# Altium PCB PCB1.pcbdoc
Units mil, origin at the board's own origin, x right, y up, seen from the top; angles counter-clockwise.
Board outline 1275.59 x 1148.67 mil, 2 copper layers (Top Layer, Bottom Layer); 28 components, 15 nets, 106 pads, 4 vias.
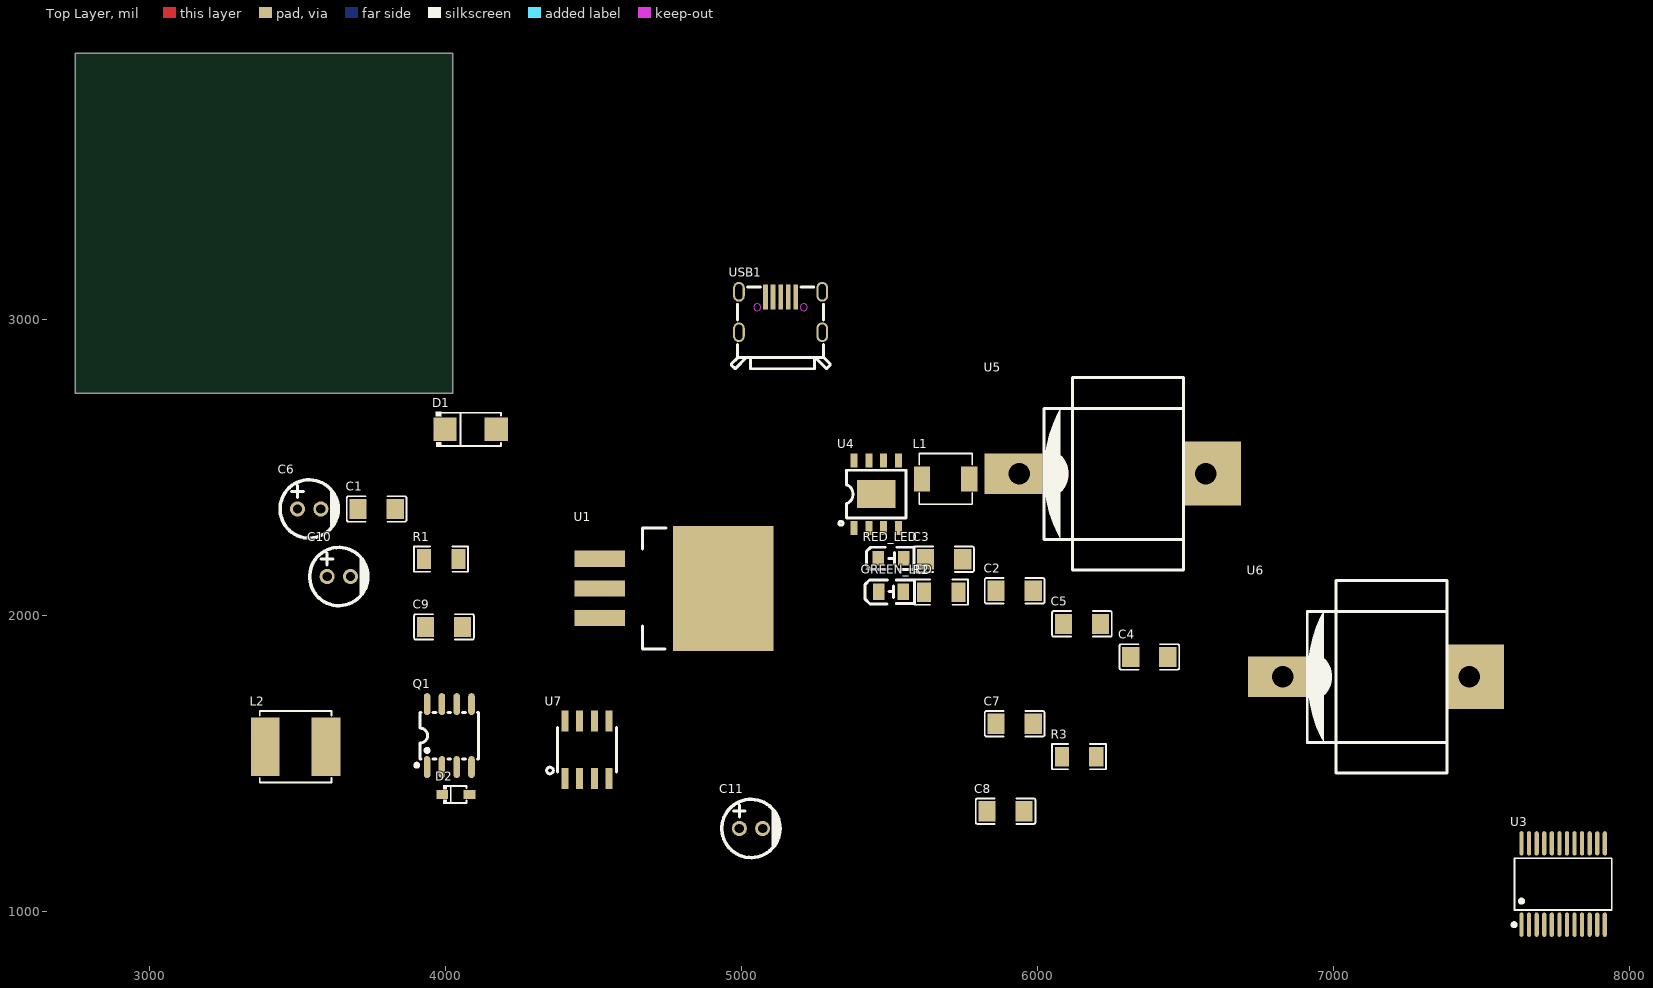
[diagram p0: Top Layer view]
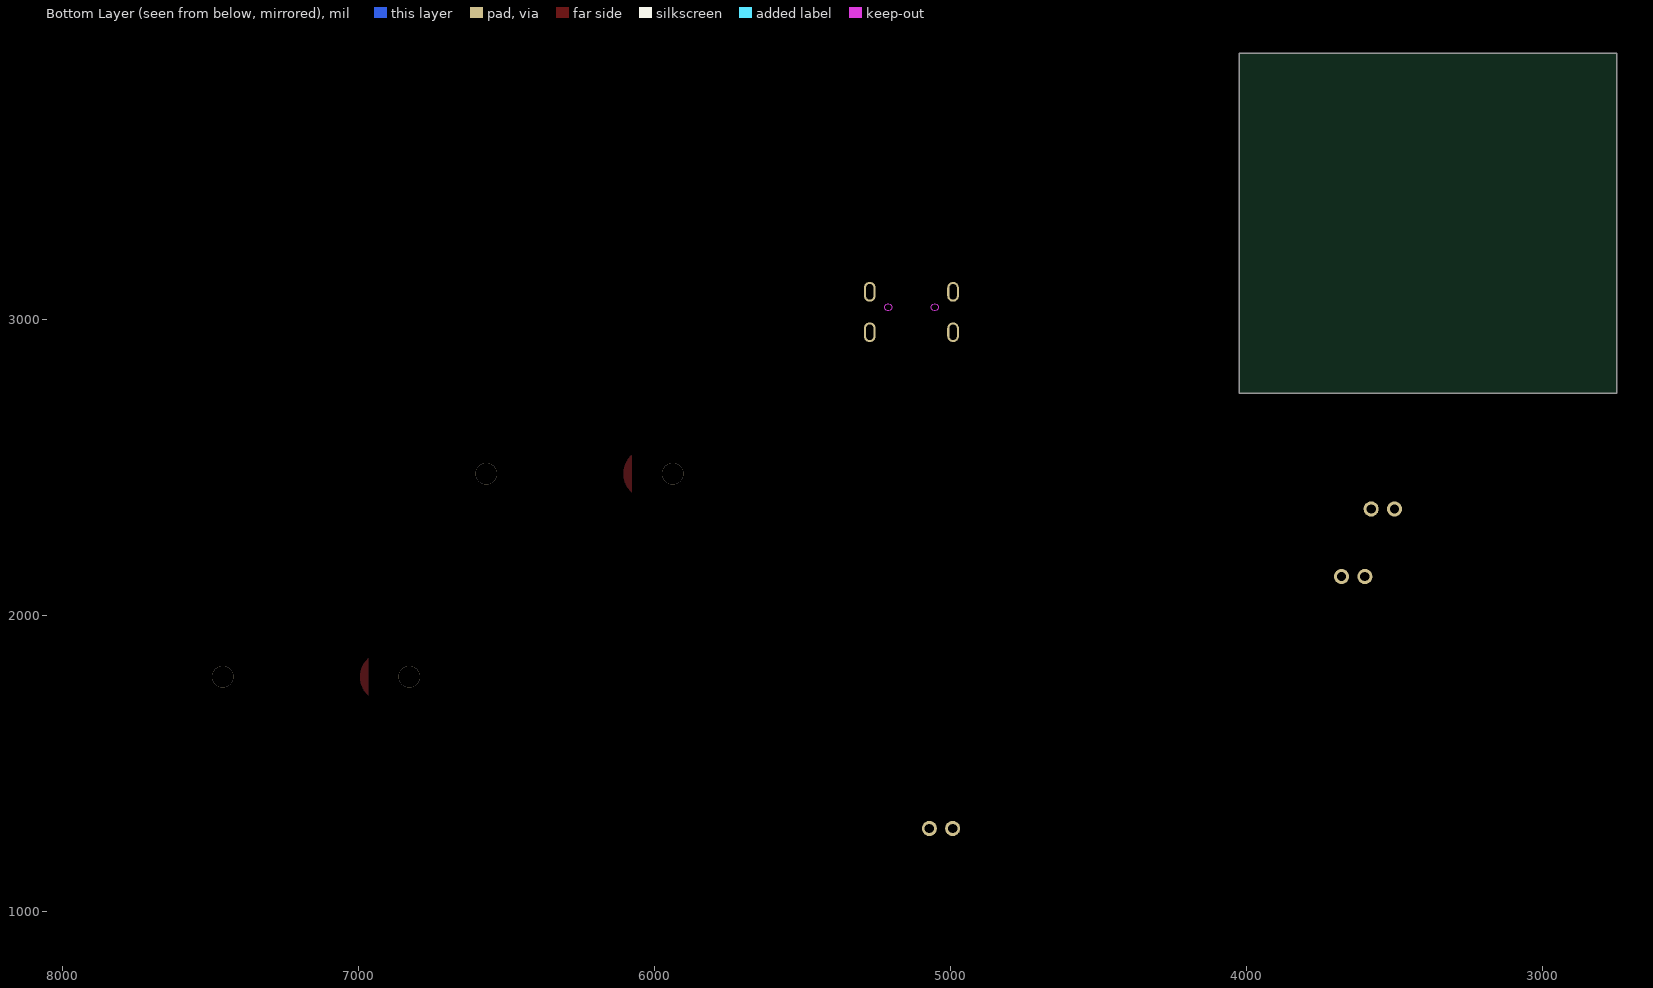
[diagram p1: Bottom Layer view, seen from below]

## Layer stack, top to bottom
Top Solder: solder mask 0.4, Solder Resist, Dk 3.5
Top Layer: signal copper 1.4
Dielectric 1: dielectric 12.6, FR-4, Dk 4.8
Bottom Layer: signal copper 1.4
Bottom Solder: solder mask 0.4, Solder Resist, Dk 3.5

## Board outline
4025.59,2750 2750,2750 2750,3898.67 4025.59,3898.67

## Design rules (kind name [scope] priority, off if disabled: settings)
Clearance [All] p1: gap=10 ignorepadtopadclearanceinfootprint=FALSE except(0: Arc-Hole Track-Hole SMDPad-Hole THPad-Hole Via-Hole Fill-Hole Poly-Hole Region-Hole Text-Hole)
PolygonConnect [All] p1: connectstyle=Relief reliefconductorwidth=10 reliefentries=4 polygonreliefangle="90 Angle" airgapwidth=10
RoutingVias [All] p1: holewidth=28 width=50 viastyle="Through Hole" minholewidth=28 minwidth=50 maxholewidth=28 maxwidth=50
SolderMaskExpansion [All] p1: expansion=4 istentingtop=FALSE
Width [All] p1: maxlimit=10 minlimit=10 preferedwidth=10
30 further rules are at their usual default settings.

## Components (designator, comment, footprint, x,y, rotation, side; value= is the part's Value field where it differs from the comment)
C1 "" C1206 3768.93,2358.48 r0 top
C2 "" C1206 5924.21,2082.07 r0 top
C3 "" C1206 5685.83,2188.44 r0 top
C4 "" C1206 6379.3,1858.64 r0 top
C5 "" C1206 6151.76,1970.35 r0 top
C6 "" CAP-TH_BD5.0-P2.00-D0.8-FD 3540.98,2358.48 r0 top
C7 "" C1206 5924.21,1632.8 r0 top
C8 "" C1206 5893.49,1337.4 r0 top
C9 "" C1206 3996.47,1960.08 r0 top
C10 "" CAP-TH_BD5.0-P2.00-D0.8-FD 3640.98,2130.12 r0 top
C11 "" CAP-TH_BD5.0-P2.00-D0.8-FD 5033.54,1279.08 r0 top
D1 "" SMA_L4.3-W2.6-LS5.1-RD 4086.53,2627.58 r0 top
D2 "" SOD-323_L1.8-W1.3-LS2.5-RD 4036.53,1393.77 r0 top
GREEN_LED "" LED0805-R-RD 5506.81,2078.85 r0 top
L1 "" IND-SMD_L4.4-W4.2 5691.25,2459.9 r0 top
L2 "" IND-SMD_L6.0-W6.0_SWPA6045S 3495,1555 r0 top
Q1 "" SO-8_L4.9-W3.9-P1.27-LS5.9-BL 4014.34,1592.74 r0 top
R1 "" R1206 3986.53,2188.97 r0 top
R2 "" R1206 5675.89,2077.25 r0 top
R3 "" R1206 6141.82,1521.62 r0 top
RED_LED "" LED0805-RD_RED 5506.81,2191.66 r0 top
U1 "" TO-263-3L_L10.0-W9.2-P2.54-TL 4731.3,2090 r0 top
U3 "" SSOP-24_L8.4-W5.8-P0.65-LS7.8-BL 7777.34,1091.27 r0 top
U4 "" ESOP-8_L4.9-W3.9-P1.27-LS6.0-BL-EP 5456.81,2408.48 r0 top
U5 "电池正极" BAT-SMD_MY-18650-02 6255.32,2477.58 r0 top
U6 "电池负极" BAT-SMD_MY-18650-02 7145.08,1791.66 r0 top
U7 "" SO-8_L4.9-W3.9-P1.27-LS6.0-BL 4479.52,1544.9 r0 top
USB1 "" MICRO-USB-SMD_KH-MICRO-SMT.ZJ-5P 5133.54,3023.77 r0 top

## Footprints (in the part's own frame and the unit in brackets; to place one, negate y for a bottom-side part, rotate by r counter-clockwise, add the part's x,y. Pads: shape width x height; smd on the part's side, far side on the other; paste and mask are expansions set on the pad)
BAT-SMD_MY-18650-02 [mm]
  rect 5x3.5 smd mask+0.05: 1(-8.5,0)
  rect 5x5.5 smd mask+0.05: 2(8.5,0)
  Top Layer region: -4.474,1.576 -4.5,1.6 -4.5,-1.6 -4.452,-1.555 -4.405,-1.509 -4.359,-1.461 -4.315,-1.411 -4.272,-1.361 -4.231,-1.309 -4.192,-1.256 -4.154,-1.201 -4.118,-1.146 -4.084,-1.089 -4.051,-1.032 -4.02,-0.973 -3.991,-0.914 -3.964,-0.853 -3.939,-0.792 -3.916,-0.731 -3.894,-0.668 -3.875,-0.605 -3.857,-0.541 -3.841,-0.477 -3.828,-0.412 -3.816,-0.347 -3.806,-0.281 -3.799,-0.216 -3.793,-0.15 -3.79,-0.084 -3.788,-0.018 -3.788,0.048 -3.791,0.115 -3.795,0.181 -3.802,0.246 -3.811,0.312 -3.821,0.377 -3.834,0.442 -3.848,0.507 -3.865,0.571 -3.883,0.634 -3.904,0.697 -3.926,0.759 -3.951,0.821 -3.977,0.882 -4.005,0.942 -4.034,1.001 -4.066,1.059 -4.1,1.116 -4.135,1.172 -4.171,1.227 -4.21,1.28 -4.25,1.333 -4.292,1.384 -4.335,1.434 -4.38,1.483 -4.426,1.53
  silkscreen extent -5.9,-8.25 6.1,8.25
C1206 [mm]
  rect 1.485x1.728 smd mask+0.051: 1(-1.593,0) 2(1.593,0)
  silkscreen extent -2.56,-1.09 2.56,1.09
CAP-TH_BD5.0-P2.00-D0.8-FD [mm]
  round 1.3 hole 0.8 mask+0.051: 1(-1,0) 2(1,0)
  silkscreen extent -2.5,-2.5 2.5,2.5
ESOP-8_L4.9-W3.9-P1.27-LS6.0-BL-EP [mm]
  rect 0.6x1.2 smd mask+0.051: 1(-1.905,-2.908) 2(-0.635,-2.908) 3(0.635,-2.908) 4(1.905,-2.908) 5(1.905,2.908) 6(0.635,2.908) 7(-0.635,2.908) 8(-1.905,2.908)
  rect 3.3x2.4 smd mask+0.051: 9(0,0)
  silkscreen extent -3.2,-2.67 2.55,2.05
IND-SMD_L4.4-W4.2 [mil]
  rect 55.1x83.5 smd mask+2: 1(79.8,0) 2(-79.8,0)
  silkscreen extent -90,-86 90,86
IND-SMD_L6.0-W6.0_SWPA6045S [mm]
  rect 2.474x5.02 smd mask+0.051: 1(-2.603,0) 2(2.603,0)
  silkscreen extent -3.08,-3.08 3.08,3.08
LED0805-R-RD [mm]
  rect 1x1.4 smd mask+0.051: 1(1.05,0) 2(-1.05,0)
  silkscreen extent -2.22,-1.04 1.99,1.01
LED0805-RD_RED [mm]
  rect 1x1.25 smd mask+0.051: 1(-1.1,0) 2(1.1,0)
  silkscreen extent -2.1,-0.95 1.98,0.96
MICRO-USB-SMD_KH-MICRO-SMT.ZJ-5P [mil]
  rect 15.7x84.6 smd mask+1.97: 1(-51.2,51.4) 2(-25.6,51.4) 3(0,51.4) 4(25.6,51.4) 5(51.2,51.4)
  oval 39.4x66.9 hole 23.6 slot 51.2 at 90 deg mask+1.97: 6(140.8,68.3) 7(140.8,-68.3) 8(-140.7,-68.3) 9(-140.7,68.3)
  Keep-Out Layer board cut-out: 90.5,16.3 90.5,18.65 88.7,22.98 85.38,26.3 81.05,28.1 76.35,28.1 72.02,26.3 68.7,22.98 66.9,18.65 66.9,16.3 66.9,13.95 68.7,9.62 72.02,6.3 76.35,4.5 81.05,4.5 85.38,6.3 88.7,9.62 90.5,13.95 90.5,16.3
  Keep-Out Layer board cut-out: -66.9,16.3 -66.9,18.65 -68.7,22.98 -72.02,26.3 -76.35,28.1 -81.05,28.1 -85.38,26.3 -88.7,22.98 -90.5,18.65 -90.5,16.3 -90.5,13.95 -88.7,9.62 -85.38,6.3 -81.05,4.5 -76.35,4.5 -72.02,6.3 -68.7,9.62 -66.9,13.95 -66.9,16.3
  silkscreen extent -166,-192 168,85
R1206 [mil]
  rect 47.54x66.97 smd mask+2: 1(-58.22,0) 2(58.22,0)
  silkscreen extent -91,-42 91,42
SMA_L4.3-W2.6-LS5.1-RD [mil]
  rect 78.7x78.7 smd mask+2: 1(-86.6,0) 2(86.6,0)
  silkscreen extent -117,-59 103,59
SO-8_L4.9-W3.9-P1.27-LS5.9-BL [mm]
  oval 0.574x1.887 smd mask+0.051: 1(-1.905,-2.7) 2(-0.635,-2.7) 3(0.635,-2.7) 4(1.905,-2.7) 5(1.905,2.7) 6(0.635,2.7) 7(-0.635,2.7) 8(-1.905,2.7)
  silkscreen extent -2.94,-2.69 2.5,2
SO-8_L4.9-W3.9-P1.27-LS6.0-BL [mil]
  rect 23.6x70.9 smd mask+1.97: 1(-75,-96.5) 2(-25,-96.5) 3(25,-96.5) 4(75,-96.5) 5(75,96.5) 6(25,96.5) 7(-25,96.5) 8(-75,96.5)
  silkscreen extent -136,-81 100,75
SOD-323_L1.8-W1.3-LS2.5-RD [mm]
  rect 1x0.75 smd mask+0.051: 1(-1.173,0) 2(1.173,0)
  silkscreen extent -1.08,-0.8 0.9,0.8
SSOP-24_L8.4-W5.8-P0.65-LS7.8-BL [mil]
  oval 14.33x81.97 smd mask+2: 1(-140.75,-137.44) 2(-115.16,-137.44) 3(-89.57,-137.44) 4(-63.98,-137.44) 5(-38.39,-137.44) 6(-12.79,-137.44) 7(12.8,-137.44) 8(38.39,-137.44) 9(63.98,-137.44) 10(89.57,-137.44) 11(115.16,-137.44) 12(140.75,-137.44) 13(140.75,137.44) 14(115.16,137.44) 15(89.57,137.44) 16(63.98,137.44) 17(38.39,137.44) 18(12.8,137.44) 19(-12.79,137.44) 20(-38.39,137.44) 21(-63.98,137.44) 22(-89.57,137.44) 23(-115.16,137.44) 24(-140.75,137.44)
  silkscreen extent -172,-143 164,87
TO-263-3L_L10.0-W9.2-P2.54-TL [mil]
  rect 169.3x55.1 smd mask+2: 1(-208.7,100) 2(-208.7,0) 3(-208.7,-100)
  rect 338.6x421.3 smd mask+2: 4(208.7,0)
  silkscreen extent -65,-205 15,205

## Via types
v1: diameter 72.83, hole 72.83, Top Layer to Bottom Layer, 4 vias

## Nets (pads, with @x,y where several pads share a name; then routed paths per layer and width w, separated by ;. In a path a pad name is that pad's centre, name@x,y a point inside that pad or via, vN(x,y) a via of type N, cw(c..) or ccw(c..) an arc to the next point about the centre after c; other vN are vias at no path point)
$1N2476: C3.2 R2.2 U4.5 USB1.1
$1N2529: GREEN_LED.1 R2.1 RED_LED.2
$1N2544: RED_LED.1 U4.2
$1N2554: GREEN_LED.2 U4.4
$1N2852: D1.2 L1.1 U4.8
$1N2881: C2.2 C4.2 C5.2 L1.2 U4.6 U5.1 U6.1
$1N3033: R1.2 U4.3
$1N7089: C8.2 U7.5
$1N7498: Q1.3 R3.1 U7.8
$1N7852: Q1.4 U7.1
$1N8885: D2.2 L2.1 Q1.5
+3.3V: C7.2 U1.2 U1.4
+5V: C1.2 C6.1 C10.1 D1.1 L2.2 U1.3 U3.20 U4.1
+12V: C9.2 C11.1 D2.1 U3.13 U3.14 U3.24 U7.2
GND: C1.1 C2.1 C3.1 C4.1 C5.1 C6.2 C7.1 C8.1 C9.1 C10.2 C11.2 R1.1 R3.2 U1.1 U3.4 U3.5 U3.9 U3.10 U3.18 U4.7 U4.9 U6.2 U7.4 U7.6 U7.7 USB1.5
pads on no net: Q1.1 Q1.2 Q1.6 Q1.7 Q1.8 U3.1 U3.2 U3.3 U3.6 U3.7 U3.8 U3.11 U3.12 U3.15 U3.16 U3.17 U3.19 U3.21 U3.22 U3.23 U5.2 U7.3 USB1.2 USB1.3 USB1.4 USB1.6 USB1.7 USB1.8 USB1.9
copper on no net:
  other v1: 6830.12,1791.66 7460.04,1791.66 5940.36,2477.58 6570.28,2477.58